# Altium PCB arduino_nano_v2.PcbDoc
Units mm, origin at the board's own origin, x right, y up, seen from the top; angles counter-clockwise.
Board outline 23.24 x 45.72 mm, 4 copper layers (Top Layer, GND, Layer 2, Bottom Layer), stack 0.603 mm thick; 33 components, 43 nets, 167 pads, 63 vias.
Unrouted connection lines stored in the file: 1.
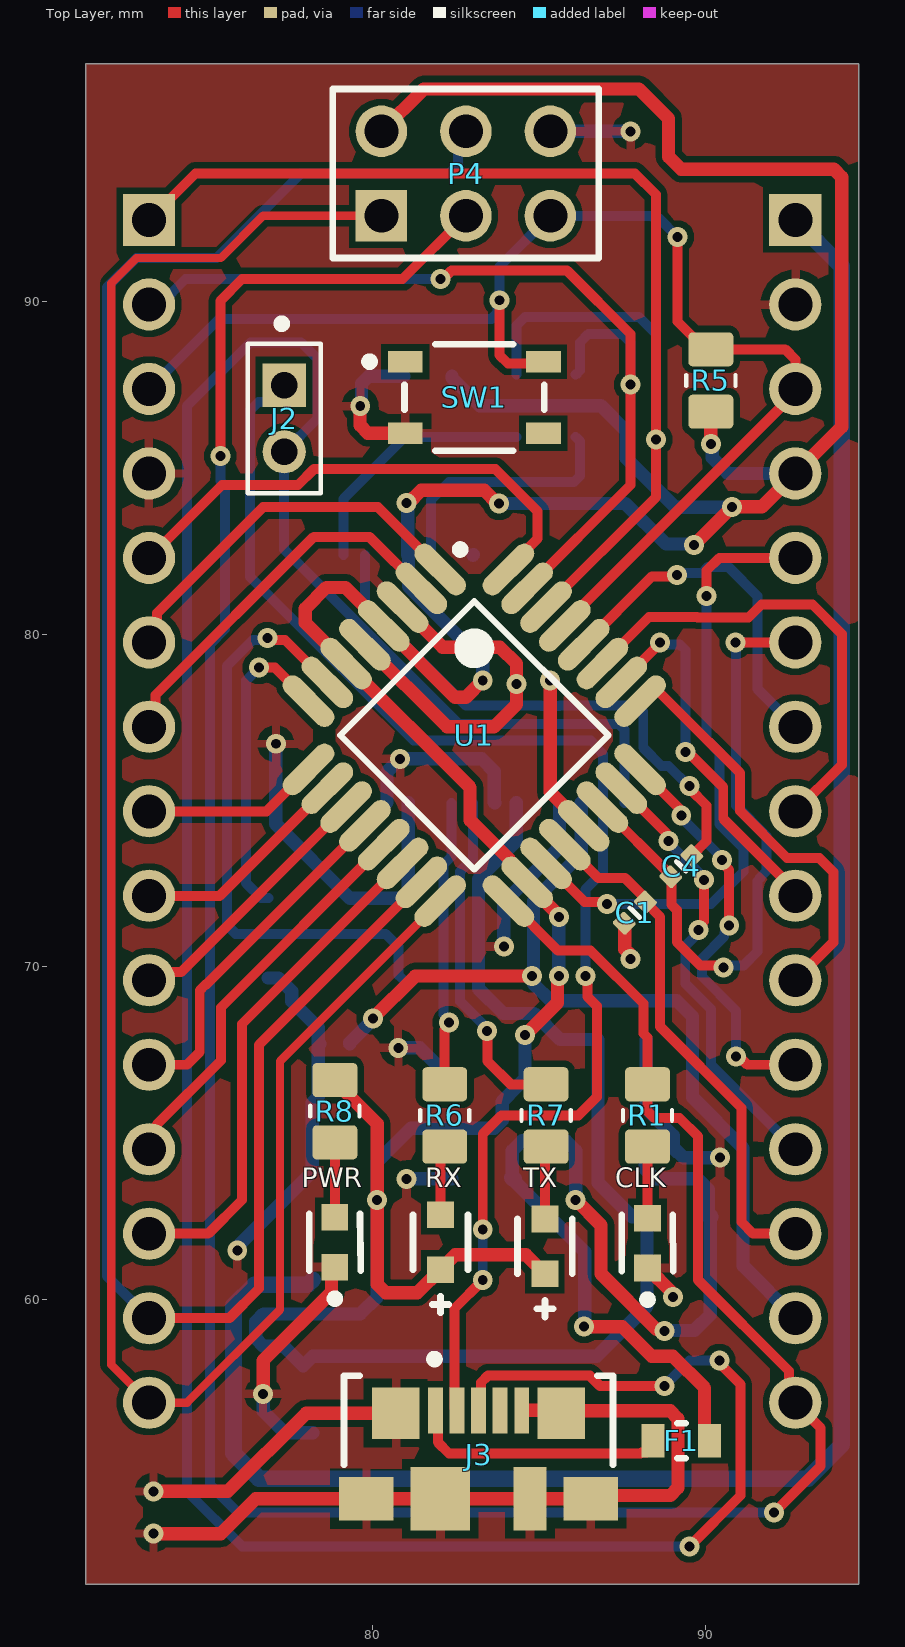
[diagram p0: Top Layer view]
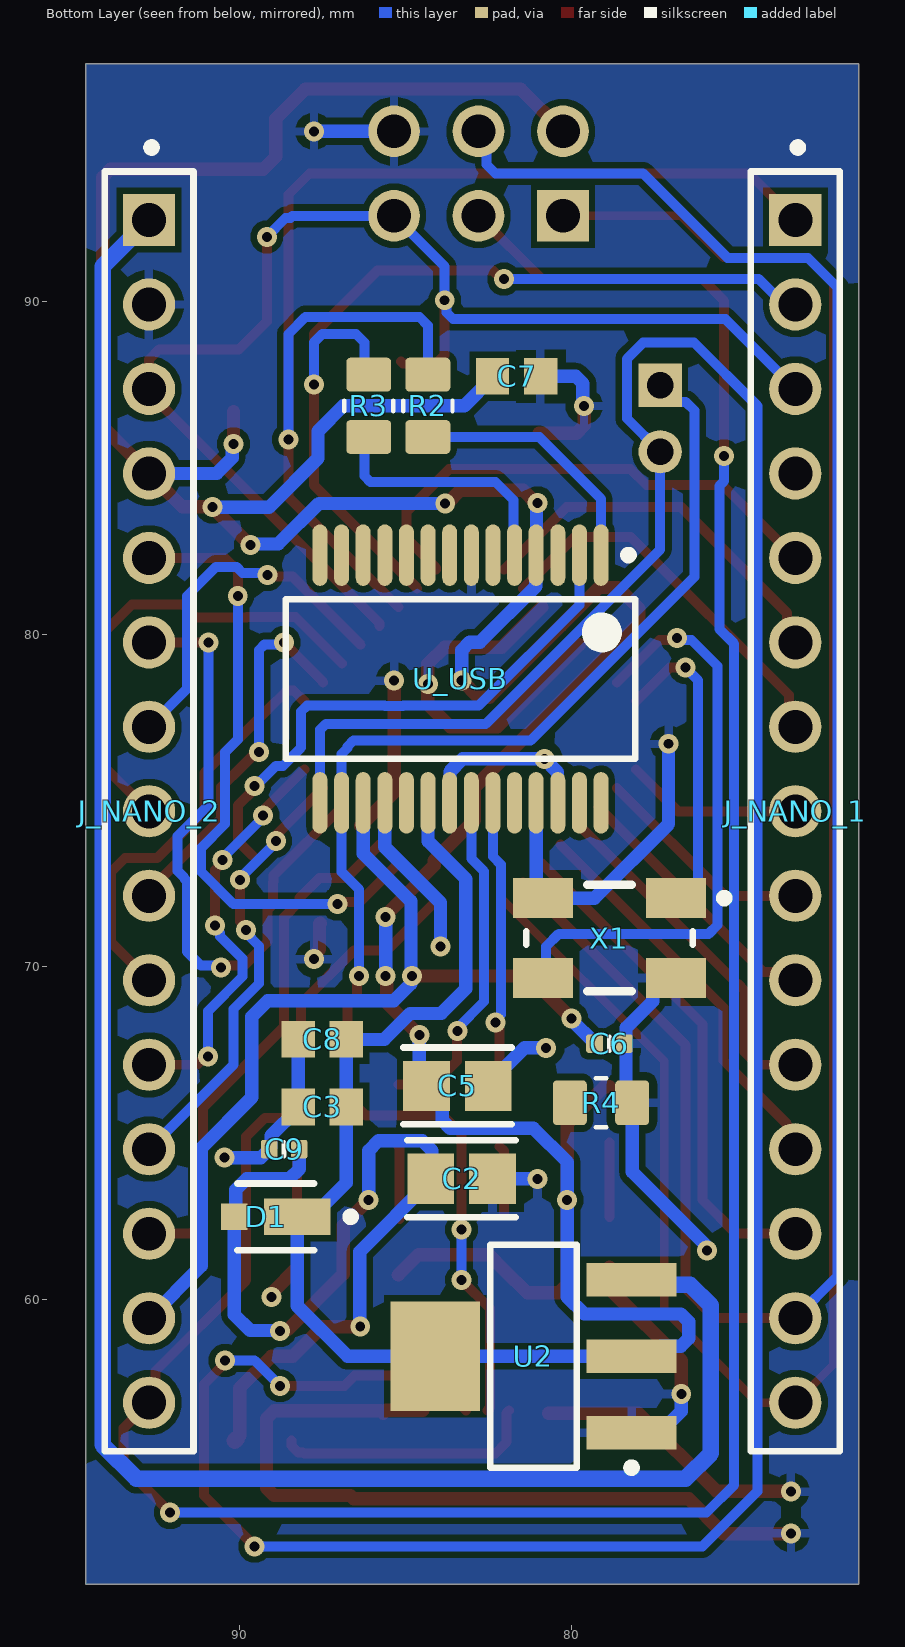
[diagram p1: Bottom Layer view, seen from below]
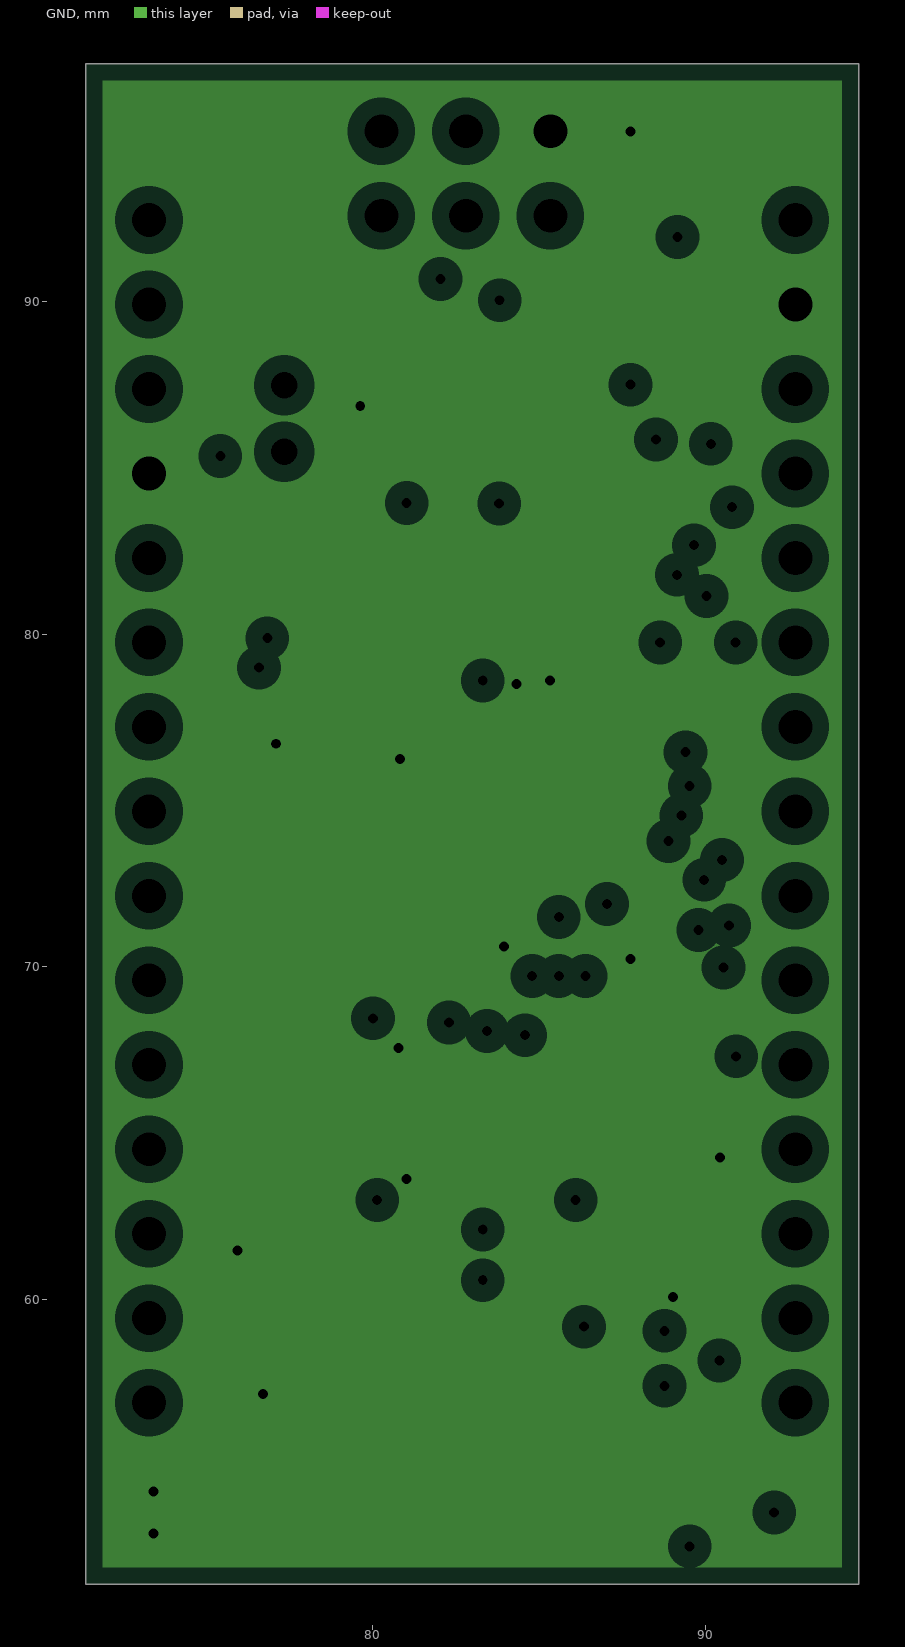
[diagram p2: GND, clearances drawn from the general rule]
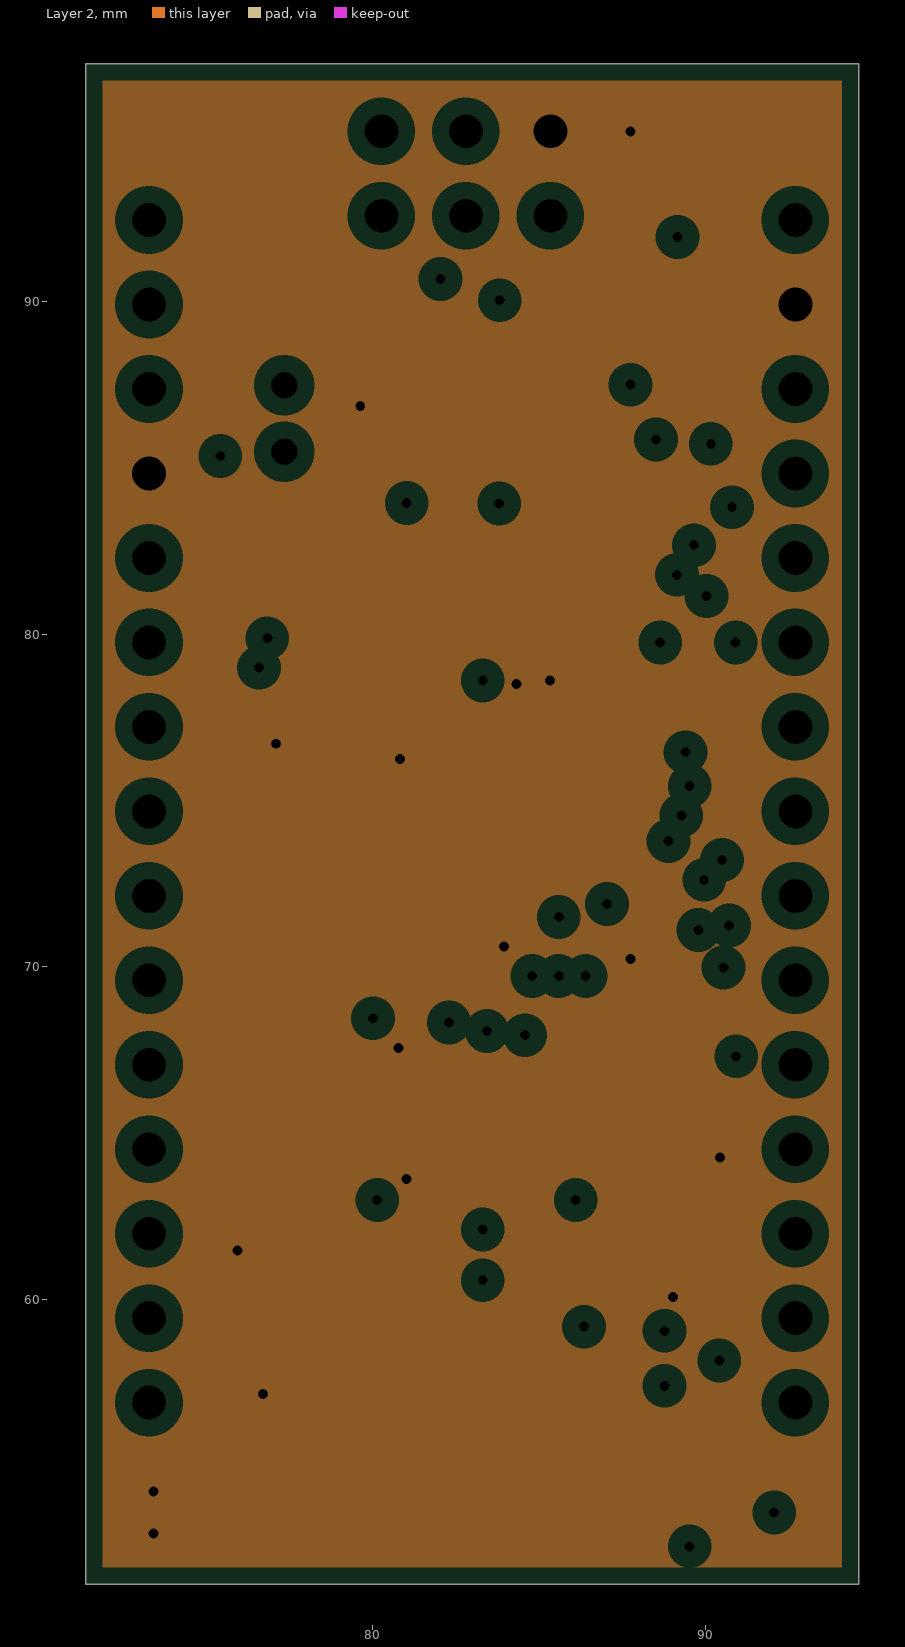
[diagram p3: Layer 2, clearances drawn from the general rule]
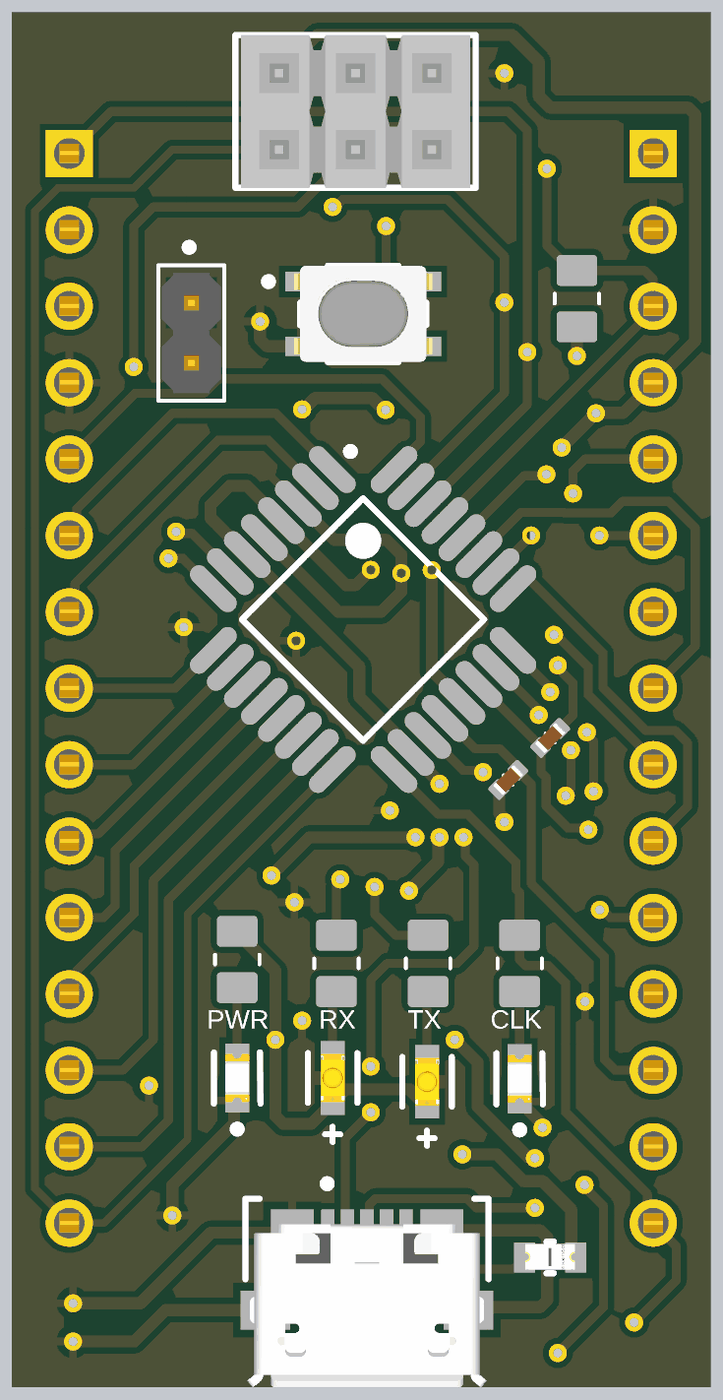
[diagram p4: 3D render of the assembled board from above, using the file's embedded part models]
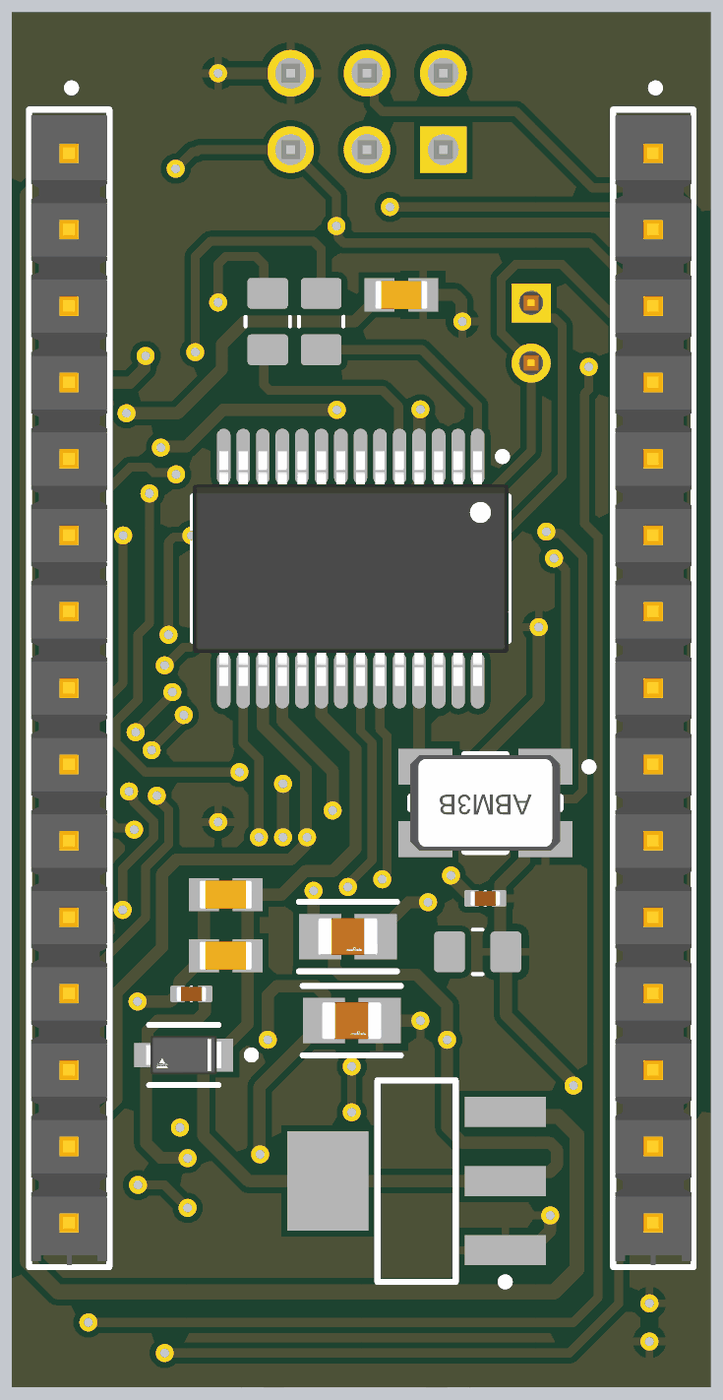
[diagram p5: 3D render of the assembled board from below, using the file's embedded part models]

## Layer stack, top to bottom
Top Solder: solder mask 0.0102, Solder Resist, Dk 3.5
Top Layer: signal copper 0.0356
Dielectric 2: prepreg 0.0711, PP-006, Dk 4.1
GND: plane copper 0.035, net GND
Dielectric 1: dielectric 0.32, FR-4, Dk 4.8
Layer 2: plane copper 0.035, net GND
Dielectric 3: prepreg 0.0711, PP-006, Dk 4.1
Bottom Layer: signal copper 0.0356
Bottom Solder: solder mask 0.0102, Solder Resist, Dk 3.5

## Board outline
71.374,51.435 71.374,97.155 94.615,97.155 94.615,51.435

## Design rules (kind name [scope] priority, off if disabled: settings)
AssemblyTestPointUsage [All] p1: isadvanced=TRUE
AssemblyTestpoint [All] p1: isadvanced=TRUE testpointundercomponent=TRUE minsize=1.016 maxsize=2.54 preferedsize=1.524 minholesize=0 maxholesize=1.016 preferedholesize=0.813 testpointgrid=0.025 usegrid=TRUE gridtolerance=0 allowsidetop=TRUE allowsidebottom=TRUE
Clearance Clearance_1 [OnMid vs OnMid] p1: gap=0.2 ignorepadtopadclearanceinfootprint=FALSE sourcerule=87 cellrowname=All cellrowtype=0 cellcolname=All cellcoltype=0 innerlayers=TRUE
Clearance Clearance_2 [(ExistsOnLayer('Top Layer') Or ExistsOnLayer('Bottom Layer')) vs (ExistsOnLayer('Top Layer') Or ExistsOnLayer('Bottom Layer'))] p2: gap=0.2 ignorepadtopadclearanceinfootprint=FALSE sourcerule=87 cellrowname=All cellrowtype=0 cellcolname=All cellcoltype=0 outerlayers=TRUE
Clearance [All] p3: gap=0.254 ignorepadtopadclearanceinfootprint=FALSE ismatrix=TRUE
ComponentClearance [All] p1: isadvanced=TRUE gap=0.254 collisioncheckmode=3 verticalgap=0.254 showdistances=FALSE
FabricationTestPointUsage [All] p1: isadvanced=TRUE valid=0 allowmultiple=FALSE
FabricationTestpoint [All] p1: isadvanced=TRUE side=3 testpointundercomponent=TRUE minsize=1.016 maxsize=2.54 preferedsize=1.524 minholesize=0 maxholesize=1.016 preferedholesize=0.813 testpointgrid=0.025 allowsidetop=TRUE allowsidebottom=TRUE usegrid=TRUE gridtolerance=0
FanoutControl Fanout_BGA [IsBGA] p1: isadvanced=TRUE bgadir=Out bgaviamode=Centered fanoutstyle=Auto fanoutdirection=Alternating viagrid=0.025 // Fanout_BGA (Default Rule)
FanoutControl Fanout_LCC [IsLCC] p2: isadvanced=TRUE bgadir=Out bgaviamode=Centered fanoutstyle=Auto fanoutdirection=Alternating viagrid=0.025 // Fanout_LCC (Default Rule)
FanoutControl Fanout_SOIC [IsSOIC] p3: isadvanced=TRUE bgadir=Out bgaviamode=Centered fanoutstyle=Auto fanoutdirection=Alternating viagrid=0.025 // Fanout_SOIC (Default Rule)
FanoutControl Fanout_Small [(CompPinCount < 5)] p4: isadvanced=TRUE bgadir=Out bgaviamode=Centered fanoutstyle=Auto fanoutdirection=OutThenIn viagrid=0.025 // Fanout_Small (Default Rule)
FanoutControl Fanout_Default [All] p5: isadvanced=TRUE bgadir=Out bgaviamode=Centered fanoutstyle=Auto fanoutdirection=Alternating viagrid=0.025 // Fanout_Default (Default Rule)
Height [All] p1: isadvanced=TRUE minheight=0 maxheight=25.4 prefheight=12.7
HoleSize [All] p1: isadvanced=TRUE absolutevalues=TRUE maxlimit=2.54 minlimit=0.025 maxpercent=80.000 minpercent=20.000
HoleToHoleClearance [All] p1: isadvanced=TRUE gap=0.254 allowstackedmicrovias=TRUE
LayerPairs [All] p1: isadvanced=TRUE enforce=TRUE
MinimumSolderMaskSliver [All] p1: isadvanced=TRUE minsoldermaskwidth=0.076
NetAntennae [All] p1: isadvanced=TRUE netantennaetolerance=0
PasteMaskExpansion [All] p1: isadvanced=TRUE expansion=0
PlaneClearance [All] p1: isadvanced=TRUE clearance=0.508
PlaneConnect [All] p1: isadvanced=TRUE planeconnectstyle=Relief reliefexpansion=0.508 reliefentries=4 reliefconductorwidth=0.254 reliefairgap=0.254
PolygonConnect [All] p1: connectstyle=Relief reliefconductorwidth=0.254 reliefentries=4 polygonreliefangle="90 Angle" airgapwidth=0.254
RoutingCorners [All] p1: isadvanced=TRUE cornerstyle=45-Degree minsetback=2.54 maxsetback=2.54
RoutingPriority [All] p1: isadvanced=TRUE routingpriority=0
RoutingVias [All] p1: holewidth=0.3 width=0.6 viastyle="Through Hole" minholewidth=0.2 minwidth=0.4 maxholewidth=0.5 maxwidth=1.27
ShortCircuit [All] p1: isadvanced=TRUE allowed=FALSE
SilkToSilkClearance [All] p1: isadvanced=TRUE silktosilkclearance=0.254
SilkToSolderMaskClearance [IsPad] p1: isadvanced=TRUE minsilkscreentomaskgap=0.076 clearancetoexposedcopper=TRUE
SolderMaskExpansion [All] p1: isadvanced=TRUE expansion=0 istentingtop=FALSE
SupplyNets "Schematic Supply Nets_4" [InNet('VIN')] p1: isadvanced=TRUE voltage=0.000
SupplyNets "Schematic Supply Nets_3" [InNet('VUSB')] p2: isadvanced=TRUE voltage=0.000
SupplyNets "Schematic Supply Nets_2" [InNet('3V3')] p3: isadvanced=TRUE voltage=0.000
SupplyNets "Schematic Supply Nets_1" [InNet('+5V')] p4: isadvanced=TRUE voltage=0.000
SupplyNets "Schematic Supply Nets" [InNet('GND')] p5: isadvanced=TRUE voltage=0.000
UnRoutedNet [All] p1: isadvanced=TRUE
UnpouredPolygon [All] p1: isadvanced=TRUE
Width MaxMinWidth_3 [InNet('GND')] p1: maxlimit=0.6 minlimit=0.3 preferedwidth=0.4 minimp=50.000000 maximp=50.000000 favimp=50.000000
Width MaxMinWidth_1 [InNet('+5V')] p2: maxlimit=0.6 minlimit=0.3 preferedwidth=0.4 minimp=50.000000 maximp=50.000000 favimp=50.000000
Width MaxMinWidth_11 [InNetClass('PWR')] p3: isadvanced=TRUE maxlimit=0.8 minlimit=0.3 preferedwidth=0.5 minimp=50.000000 maximp=50.000000 favimp=50.000000
Width MaxMinWidth_2 [InNet('3V3')] p4: maxlimit=0.6 minlimit=0.3 preferedwidth=0.4 minimp=50.000000 maximp=50.000000 favimp=50.000000
Width MaxMinWidth_6 [InNet('D-')] p5: maxlimit=0.3 minlimit=0.2 preferedwidth=0.254 minimp=50.000000 maximp=50.000000 favimp=50.000000
Width MaxMinWidth_7 [InNet('VIN')] p6: maxlimit=0.6 minlimit=0.3 preferedwidth=0.4 minimp=50.000000 maximp=50.000000 favimp=50.000000
Width MaxMinWidth_8 [InNet('VUSB')] p7: maxlimit=0.6 minlimit=0.3 preferedwidth=0.4 minimp=50.000000 maximp=50.000000 favimp=50.000000
Width MaxMinWidth_9 [InNet('D+')] p8: maxlimit=0.3 minlimit=0.2 preferedwidth=0.254 minimp=50.000000 maximp=50.000000 favimp=50.000000
Width MaxMinWidth_10 [InNet('MISO')] p9: maxlimit=0.3 minlimit=0.2 preferedwidth=0.254 minimp=50.000000 maximp=50.000000 favimp=50.000000
Width MaxMinWidth_12 [InNet('MOSI')] p10: maxlimit=0.3 minlimit=0.2 preferedwidth=0.254 minimp=50.000000 maximp=50.000000 favimp=50.000000
Width MaxMinWidth_13 [InNet('NetC1_2')] p11: maxlimit=0.3 minlimit=0.2 preferedwidth=0.254 minimp=50.000000 maximp=50.000000 favimp=50.000000
Width MaxMinWidth_14 [InNet('NetC4_1')] p12: maxlimit=0.3 minlimit=0.2 preferedwidth=0.254 minimp=50.000000 maximp=50.000000 favimp=50.000000
Width MaxMinWidth_15 [InNet('NetC4_2')] p13: maxlimit=0.3 minlimit=0.2 preferedwidth=0.254 minimp=50.000000 maximp=50.000000 favimp=50.000000
Width MaxMinWidth_16 [InNet('NetCLK_2')] p14: maxlimit=0.3 minlimit=0.2 preferedwidth=0.254 minimp=50.000000 maximp=50.000000 favimp=50.000000
Width MaxMinWidth_17 [InNet('NetF1_1')] p15: maxlimit=0.3 minlimit=0.2 preferedwidth=0.254 minimp=50.000000 maximp=50.000000 favimp=50.000000
Width MaxMinWidth_18 [InNet('NetJ_NANO_1_5')] p16: maxlimit=0.3 minlimit=0.2 preferedwidth=0.254 minimp=50.000000 maximp=50.000000 favimp=50.000000
Width MaxMinWidth_19 [InNet('NetJ_NANO_1_6')] p17: maxlimit=0.3 minlimit=0.2 preferedwidth=0.254 minimp=50.000000 maximp=50.000000 favimp=50.000000
Width MaxMinWidth_20 [InNet('NetJ_NANO_1_7')] p18: maxlimit=0.3 minlimit=0.2 preferedwidth=0.254 minimp=50.000000 maximp=50.000000 favimp=50.000000
Width MaxMinWidth_21 [InNet('NetJ_NANO_1_8')] p19: maxlimit=0.3 minlimit=0.2 preferedwidth=0.254 minimp=50.000000 maximp=50.000000 favimp=50.000000
Width MaxMinWidth_22 [InNet('NetJ_NANO_1_9')] p20: maxlimit=0.3 minlimit=0.2 preferedwidth=0.254 minimp=50.000000 maximp=50.000000 favimp=50.000000
Width MaxMinWidth_23 [InNet('NetJ_NANO_1_10')] p21: maxlimit=0.3 minlimit=0.2 preferedwidth=0.254 minimp=50.000000 maximp=50.000000 favimp=50.000000
Width MaxMinWidth_24 [InNet('NetJ_NANO_1_11')] p22: maxlimit=0.3 minlimit=0.2 preferedwidth=0.254 minimp=50.000000 maximp=50.000000 favimp=50.000000
Width MaxMinWidth_25 [InNet('NetJ_NANO_1_12')] p23: maxlimit=0.3 minlimit=0.2 preferedwidth=0.254 minimp=50.000000 maximp=50.000000 favimp=50.000000
Width MaxMinWidth_26 [InNet('NetJ_NANO_1_13')] p24: maxlimit=0.3 minlimit=0.2 preferedwidth=0.254 minimp=50.000000 maximp=50.000000 favimp=50.000000
Width MaxMinWidth_27 [InNet('NetJ_NANO_2_5')] p25: maxlimit=0.3 minlimit=0.2 preferedwidth=0.254 minimp=50.000000 maximp=50.000000 favimp=50.000000
Width MaxMinWidth_28 [InNet('NetJ_NANO_2_7')] p26: maxlimit=0.3 minlimit=0.2 preferedwidth=0.254 minimp=50.000000 maximp=50.000000 favimp=50.000000
Width MaxMinWidth_29 [InNet('NetJ_NANO_2_8')] p27: maxlimit=0.3 minlimit=0.2 preferedwidth=0.254 minimp=50.000000 maximp=50.000000 favimp=50.000000
Width MaxMinWidth_30 [InNet('NetJ_NANO_2_9')] p28: maxlimit=0.3 minlimit=0.2 preferedwidth=0.254 minimp=50.000000 maximp=50.000000 favimp=50.000000
Width MaxMinWidth_31 [InNet('NetJ_NANO_2_10')] p29: maxlimit=0.3 minlimit=0.2 preferedwidth=0.254 minimp=50.000000 maximp=50.000000 favimp=50.000000
Width MaxMinWidth_32 [InNet('NetJ_NANO_2_11')] p30: maxlimit=0.3 minlimit=0.2 preferedwidth=0.254 minimp=50.000000 maximp=50.000000 favimp=50.000000
Width MaxMinWidth_33 [InNet('NetJ_NANO_2_12')] p31: maxlimit=0.3 minlimit=0.2 preferedwidth=0.254 minimp=50.000000 maximp=50.000000 favimp=50.000000
Width MaxMinWidth_34 [InNet('NetPWR_2')] p32: maxlimit=0.3 minlimit=0.2 preferedwidth=0.254 minimp=50.000000 maximp=50.000000 favimp=50.000000
Width MaxMinWidth_35 [InNet('NetR2_2')] p33: maxlimit=0.3 minlimit=0.2 preferedwidth=0.254 minimp=50.000000 maximp=50.000000 favimp=50.000000
Width MaxMinWidth_36 [InNet('NetR3_2')] p34: maxlimit=0.3 minlimit=0.2 preferedwidth=0.254 minimp=50.000000 maximp=50.000000 favimp=50.000000
Width MaxMinWidth_37 [InNet('NetR6_1')] p35: maxlimit=0.3 minlimit=0.2 preferedwidth=0.254 minimp=50.000000 maximp=50.000000 favimp=50.000000
Width MaxMinWidth_38 [InNet('NetR6_2')] p36: maxlimit=0.3 minlimit=0.2 preferedwidth=0.254 minimp=50.000000 maximp=50.000000 favimp=50.000000
Width MaxMinWidth_39 [InNet('NetR7_1')] p37: maxlimit=0.3 minlimit=0.2 preferedwidth=0.254 minimp=50.000000 maximp=50.000000 favimp=50.000000
Width MaxMinWidth_40 [InNet('NetR7_2')] p38: maxlimit=0.3 minlimit=0.2 preferedwidth=0.254 minimp=50.000000 maximp=50.000000 favimp=50.000000
Width MaxMinWidth_41 [InNet('PB5_SCK')] p39: maxlimit=0.3 minlimit=0.2 preferedwidth=0.254 minimp=50.000000 maximp=50.000000 favimp=50.000000
Width MaxMinWidth_42 [InNet('PB6')] p40: maxlimit=0.3 minlimit=0.2 preferedwidth=0.254 minimp=50.000000 maximp=50.000000 favimp=50.000000
Width MaxMinWidth_43 [InNet('PB7')] p41: maxlimit=0.3 minlimit=0.2 preferedwidth=0.254 minimp=50.000000 maximp=50.000000 favimp=50.000000
Width MaxMinWidth_44 [InNet('PD0_RXD')] p42: maxlimit=0.3 minlimit=0.2 preferedwidth=0.254 minimp=50.000000 maximp=50.000000 favimp=50.000000
Width MaxMinWidth_45 [InNet('PD1_TXD')] p43: maxlimit=0.3 minlimit=0.2 preferedwidth=0.254 minimp=50.000000 maximp=50.000000 favimp=50.000000
Width MaxMinWidth_46 [InNet('RESET')] p44: maxlimit=0.3 minlimit=0.2 preferedwidth=0.254 minimp=50.000000 maximp=50.000000 favimp=50.000000
Width MaxMinWidth_4 [InNetClass('PWR')] p45: maxlimit=0.6 minlimit=0.3 preferedwidth=0.4 minimp=50.000000 maximp=50.000000 favimp=50.000000
Width MaxMinWidth_5 [InNetClass('SIGNAL')] p46: maxlimit=0.3 minlimit=0.2 preferedwidth=0.254 minimp=50.000000 maximp=50.000000 favimp=50.000000
Width [All] p47: maxlimit=0.254 minlimit=0.254 preferedwidth=0.254
4 further rules are at their usual default settings.

## Classes and differential pairs
component class U_USB: C4 C6 F1 J2 J3 R6 R7 RX TX U_USB
component class U_connector: J_NANO_1 J_NANO_2
component class U_arduino_nano: C1 C2 C3 C5 C7 C8 C9 CLK D1 P4 PWR R1 R2 R3 R4 R5 R8 SW1 X1

## Components (designator, comment, footprint, x,y, rotation, side; value= is the part's Value field where it differs from the comment)
C1 "Capacitor 100nF +/-20% 25V 0402" CAPC0402(1005)60_L 87.884,71.628 r45 top value=100nF
C2 "4.7 uF" FP-GRM21B-0_15-IPC_A 83.312,63.627 r180 bottom
C3 "Capacitor 1uF +/- 10% 16V 0603" CAPC1608X90X35ML15T15 87.503,65.786 r0 bottom value=1µF
C4 "Capacitor 100nF +/-20% 25V 0402" CAPC0402(1005)60_L 89.281,73.025 r225 top value=100nF
C5 "4.7 uF" FP-GRM21B-0_15-IPC_A 83.439,66.421 r180 bottom
C6 "Capacitor 100nF +/-20% 25V 0402" CAPC0402(1005)60_L 78.867,67.691 r180 bottom value=100nF
C7 "Capacitor 1uF +/- 10% 16V 0603" CAPC1608X90X35ML15T15 81.661,87.757 r180 bottom value=1µF
C8 "Capacitor 1uF +/- 10% 16V 0603" CAPC1608X90X35ML15T15 87.503,67.818 r180 bottom value=1µF
C9 "Capacitor 100nF +/-20% 25V 0402" CAPC0402(1005)60_L 88.646,64.516 r0 bottom value=100nF
CLK "" FP-5973901831F-MFG 88.265,61.695 r90 top
D1 "MSS1P3L-M3/89A" FP-96591-MFG 88.9,62.484 r0 bottom value=65pF
F1 "MF-FSMF050X-2" FP-MF-FSMF-MFG 89.281,55.753 r0 top value=0.1-0.8Ω
J2 "NRPN021PAEN-RC" NRPN021PAEN-RC_MFG 77.343,86.487 r270 top
J3 "473460001" FP-473460001-MFG 83.185,54.356 r0 top
J_NANO_1 "TSW-115-07-G-S" FP-TSW-115-07-G-S-MFG 73.279,74.676 r90 bottom
J_NANO_2 "TSW-115-07-G-S" FP-TSW-115-07-G-S-MFG 92.71,74.676 r90 bottom
P4 "TSW-103-08-T-D" SMTC-TSW-103-08-X-D 80.264,92.583 r0 top
PWR "" FP-5973901831F-MFG 78.867,61.722 r90 top
R1 "ERJP06J102V_with_model" RESC2012X70N 88.265,65.532 r270 top value=1k
R2 "ERJP06J102V_with_model" RESC2012X70N 84.328,86.868 r270 bottom value=1k
R3 "ERJP06J102V_with_model" RESC2012X70N 86.106,86.868 r270 bottom value=1k
R4 "ERJP06J102V_with_model" RESC2012X70N 79.121,65.913 r0 bottom value=1k
R5 "ERJP06J102V_with_model" RESC2012X70N 90.17,87.63 r270 top value=1k
R6 "ERJP06J102V_with_model" RESC2012X70N 82.169,65.532 r90 top value=1k
R7 "ERJP06J102V_with_model" RESC2012X70N 85.217,65.532 r90 top value=1k
R8 "ERJP06J102V_with_model" RESC2012X70N 78.867,65.659 r270 top value=1k
RX "" FP-APTD1608SYC-J3-MFG 82.042,61.722 r270 top
SW1 "" FP-PTS810SJM250SMTRLFS-MFG 83.058,87.122 r0 top
TX "" FP-APTD1608SYC-J3-MFG 85.182,61.595 r270 top
U1 "ATmega328P-AU" 32A_M 83.058,76.962 r315 top
U2 "LM1117IMPX-5.0/NOPB" MP04A_M 81.153,58.293 r0 bottom
U_USB "FT232RL" FTDI-SSOP-28_M 83.346,78.655 r270 bottom
X1 "ABM3B-16.000MHZ-B2-T" ABRA-ABM3B-4_V 78.867,70.866 r0 bottom

## Footprints (in the part's own frame and the unit in brackets; to place one, negate y for a bottom-side part, rotate by r counter-clockwise, add the part's x,y. Pads: shape width x height; smd on the part's side, far side on the other; paste and mask are expansions set on the pad)
32A_M [mm] "Thin QFP, 32-Leads, Body 7x7mm, Pitch 0.8mm, IPC Low Density"
  oval 1.95x0.6 smd: 1(-4.25,2.8) 2(-4.25,2) 3(-4.25,1.2) 4(-4.25,0.4) 5(-4.25,-0.4) 6(-4.25,-1.2) 7(-4.25,-2) 8(-4.25,-2.8) 17(4.25,-2.8) 18(4.25,-2) 19(4.25,-1.2) 20(4.25,-0.4) 21(4.25,0.4) 22(4.25,1.2) 23(4.25,2) 24(4.25,2.8)
  oval 0.6x1.95 smd: 9(-2.8,-4.25) 10(-2,-4.25) 11(-1.2,-4.25) 12(-0.4,-4.25) 13(0.4,-4.25) 14(1.2,-4.25) 15(2,-4.25) 16(2.8,-4.25) 25(2.8,4.25) 26(2,4.25) 27(1.2,4.25) 28(0.4,4.25) 29(-0.4,4.25) 30(-1.2,4.25) 31(-2,4.25) 32(-2.8,4.25)
  silkscreen extent -4.37,-2.85 2.85,3.77, body extent -3.5,-3.5 3.5,3.5, height 1.2
ABRA-ABM3B-4_V [mm] "SMD, 4-Leads, Body 5x3.2mm"
  rect 1.8x1.2 smd: 1(-2,-1.2) 2(2,-1.2) 3(2,1.2) 4(-2,1.2)
  silkscreen extent -3.57,-1.6 2.5,1.6, body extent -2.5,-1.59 2.5,1.59, height 1.13
CAPC0402(1005)60_L [mm] "Chip Capacitor, Body 1.0x0.5mm, Height 0.6mm, IPC High Density"
  rrect25% 0.5x0.55 smd: 1(-0.45,0) 2(0.45,0)
  silkscreen extent 0,-0.2 0,0.2, body extent -0.5,-0.25 0.5,0.25, height 0.6
CAPC1608X90X35ML15T15 [mm] "Chip Capacitor, 2-Leads, Body 1.75x0.95mm, IPC Low Density"
  rect 1x1.1 smd: 1(-0.725,0) 2(0.725,0)
  body extent -0.87,-0.48 0.87,0.48, height 0.9
FP-96591-MFG [mm]
  rect 2x1.1 smd paste+0 mask+0: 1(-0.65,0)
  rect 0.8x0.8 smd paste+0 mask+0: 2(1.25,0)
  silkscreen extent -2.37,-1 1.15,1, body extent -1.25,-0.65 1.25,0.65, height 0.73
FP-473460001-MFG [mm]
  rect 0.45x1.38 smd paste+0 mask+0: 1(-1.3,2.31) 2(-0.65,2.31) 3(0,2.31) 4(0.65,2.31) 5(1.3,2.31)
  rect 1.425x1.55 smd paste+0 mask+0: 6(-2.488,2.225) 7(2.488,2.225)
  rect 1.65x1.3 smd paste+0 mask+0: 8(-3.375,-0.35) 11(3.375,-0.35)
  rect 1.8x1.9 smd paste+0 mask+0: 9(-1.15,-0.35)
  rect 1x1.9 smd paste+0 mask+0: 10(1.55,-0.35)
  silkscreen extent -4.05,0.67 4.05,3.97, body extent -4.3,-2.48 4.3,3.45, height 0.25
FP-5973901831F-MFG [mm]
  rect 0.8x0.8 smd paste+0 mask+0: 1(-0.75,0) 2(0.75,0)
  silkscreen extent -1.82,-0.77 0.85,0.77, body extent -1.25,-0.56 1.25,0.56, height 0.25
FP-APTD1608SYC-J3-MFG [mm]
  rect 0.8x0.8 smd paste+0 mask+0: 1(-0.825,0) 2(0.825,0)
  silkscreen extent -0.82,-0.82 2.12,0.82, body extent -1.33,-0.58 1.33,0.58, height 0.25
FP-GRM21B-0_15-IPC_A [mm]
  rect 1.406x1.508 smd paste+0 mask+0: 1(-0.926,0) 2(0.926,0)
  silkscreen extent -1.63,-1.15 1.63,1.15, body extent -1,-0.63 1,0.63, height 1.4
FP-MF-FSMF-MFG [mm]
  rect 0.7x1 smd paste+0 mask+0: 1(-0.85,0) 2(0.85,0)
  silkscreen extent -0.13,-0.53 0.13,0.53, body extent -1.3,-0.63 1.3,0.63, height 0.25
FP-PTS810SJM250SMTRLFS-MFG [mm]
  rect 1.05x0.65 smd paste+0 mask+0: 1(-2.075,1.075) 2(2.075,1.075) 3(-2.075,-1.075) 4(2.075,-1.075)
  silkscreen extent -3.27,-1.6 2.1,1.6, body extent -2.7,-1.7 2.7,1.7, height 0.25
FP-TSW-115-07-G-S-MFG [mm]
  rect 1.57x1.57 hole 1.02 paste-2539.97 mask+0: 1(17.78,0)
  round 1.57 hole 1.02 paste-2539.97 mask+0: 2(15.24,0) 3(12.7,0) 4(10.16,0) 5(7.62,0) 6(5.08,0) 7(2.54,0) 8(0,0) 9(-2.54,0) 10(-5.08,0) 11(-7.62,0) 12(-10.16,0) 13(-12.7,0) 14(-15.24,0) 15(-17.78,0)
  silkscreen extent -19.24,-1.34 20.08,1.34, body extent -19.18,-1.27 19.05,1.27, height 8.63
FTDI-SSOP-28_M [mm] "SOP, 28-Leads, Body 10.5x5.6mm, Pitch 0.65mm, IPC Low Density"
  oval 1.85x0.45 smd: 1(-3.725,4.225) 2(-3.725,3.575) 3(-3.725,2.925) 4(-3.725,2.275) 5(-3.725,1.625) 6(-3.725,0.975) 7(-3.725,0.325) 8(-3.725,-0.325) 9(-3.725,-0.975) 10(-3.725,-1.625) 11(-3.725,-2.275) 12(-3.725,-2.925) 13(-3.725,-3.575) 14(-3.725,-4.225) 15(3.725,-4.225) 16(3.725,-3.575) 17(3.725,-2.925) 18(3.725,-2.275) 19(3.725,-1.625) 20(3.725,-0.975) 21(3.725,-0.325) 22(3.725,0.325) 23(3.725,0.975) 24(3.725,1.625) 25(3.725,2.275) 26(3.725,2.925) 27(3.725,3.575) 28(3.725,4.225)
  silkscreen extent -3.85,-5.25 2.4,5.25, body extent -3.9,-5.25 3.9,5.25, height 2
MP04A_M [mm] "SOT223, 4-Leads, Body 6.5x3.5mm, Pitch 2.3mm, Lead Span 7mm, IPC Low Density"
  rect 2.7x1 smd: 1(-2.95,2.3) 2(-2.95,0) 3(-2.95,-2.3)
  rect 2.7x3.3 smd: 4(2.95,0)
  silkscreen extent -3.07,-3.35 1.3,3.47, body extent -1.86,-3.35 1.86,3.35, height 1.8
NRPN021PAEN-RC_MFG [mm] "Recommended Land Pattern"
  rect 1.3x1.3 hole 0.8 paste-2539.97 mask+0: 1(-1,0)
  round 1.3 hole 0.8 paste-2539.97 mask+0: 2(1,0)
  silkscreen extent -2.97,-1.1 2.25,1.1, body extent -2,-1 2,1, height 5.95
RESC2012X70N [mm] "Chip Resistor, 2-Leads, Body 2,00x1,25mm, IPC Medium Density"
  rrect25% 1.025x1.35 smd: 1(-0.937,0) 2(0.938,0)
  silkscreen extent -0.16,-0.74 0.16,0.74, body extent -1,-0.63 1,0.63, height 0.7
SMTC-TSW-103-08-X-D [mm] ".025 SQ Post Terminal Strip Assembly, 2x3 Pins, Vertical, 2.54mm Pitch, Male"
  rect 1.55x1.55 hole 1.02: 1(0,0)
  round 1.55 hole 1.02: 2(0,2.54) 3(2.54,0) 4(2.54,2.54) 5(5.08,0) 6(5.08,2.54)
  silkscreen extent -1.46,-1.27 6.54,3.81, body extent -1.27,-1.27 6.35,3.81, height 8.38

## Part data
C1 C4 C6 C9: library part CMP-001-00065-4, "Chip Capacitor, 100nF +/-20%, 25V, 0402, Thickness 0.6 mm", Case/Package=0402, Max Operating Temperature=85°C, Min Operating Temperature=-55°C, Tolerance=10%, Voltage Rating=25V, Mounting Technology=SMT, Pins=2
C2 C5: library part CMP-06035-033280-1, "Chip Multilayer Ceramic Capacitors for General Purpose, 0805, 4.7uF, X6S, 22%, 20%, 35V", Capacitance=4.7uF, Case/Package=0805, Dielectric=X6S, Tolerance=20%, Voltage Rating (DC)=35V, Length=2mm, Thickness=1.25mm, Width=1.25mm
C3 C7 C8: library part CMP-001-00004-6, "Chip Capacitor, 1 uF, +/- 10%, 16 V, 0603 (1608 Metric)", Capacitor Type=Ceramic, Case/Package=0603, Max Operating Temperature=125°C, Min Operating Temperature=-55°C, Tolerance=10%, Voltage Rating=16V, Mounting Technology=SM, Pins=2, RoHS Compliant=True
CLK PWR: library part CMP-15384-000002-3, "LED COOL WHITE 2SMD", Case Code (Imperial)=0603, Case Code (Metric)=1608, Color=White, Forward Current=10mA, Forward Voltage=3.4V, Lens Color=Yellow, Max Operating Temperature=80°C, Min Operating Temperature=-20°C, Power Dissipation=70mW, Reverse Voltage=5V, Case/Package=0603, Height=550µm, Illumination Color=White, Length=1.6mm, Lens Style="Diffused, Rectangular, Tinted", Luminous Intensity=240mcd, Mount="Surface Mount", NexarPartId=10598902, Packaging="Cut Tape", Power Rating=70mW, REACH SVHC="No SVHC", RoHS=Compliant, Test Current=10mA, Viewing Angle=130°, Width=800µm
D1: library part CMP-02539-000006-1, "DIODE SCHOTTKY 30V 1A MICROSMP", Capacitance=65pF, Forward Current=1A, Manufacturer=Vishay, Max Junction Temp=+150°C, Max Repetitive Reverse Voltage=30V, Max Surge Forward Current=25A, Package=96591, Peak Reverse Current=15uA, Temperature="-55°C to +150°C", Temperature Range Low=-55°C, Automotive=No, Category=Diode, ComponentLink2Description=Datasheet, ComponentLink2URL=http://www.vishay.com/docs/89020/mss1p3l.pdf, Device Class L1="Discrete Semiconductors", Device Class L2=Diodes, Device Class L3="Schottky Diodes", Digikey Description="DIODE SCHOTTKY 30V 1A MICROSMP", Footprint Url=http://www.vishay.com/docs/96591/microsmp_do-219ad_fredpt.pdf, Height=0.73mm, Lead Free=Yes, Manufacturer Part Number=MSS1P3L-M3/89A, Mouser Description="Schottky Diodes & Rectifiers 1.0 Amp 30 Volt", Octopart=https://octopart.com/mss1p3l-m3%2F89a-vishay-42670898, RoHS=TRUE, Temperature Range High=+150°C
F1: library part CMP-07400-000010-1, "PTC RESET FUSE 6V 500MA 0603", Ambient Temperature Range High=+85°C, Ambient Temperature Range Low=-40°C, Current Rating=40A, Hold Current=0.5A, Manufacturer="Bourns Inc.", Package=MF-FSMF, Resistance=0.1-0.8Ω, Temperature="-40°C to +85°C", Trip Current=1A, Voltage Rating=6V, Automotive=No, Category=Fuse, ComponentLink2Description=Datasheet, ComponentLink2URL=https://www.bourns.com/docs/Product-Datasheets/mffsmf.pdf, Device Class L1="Circuit Protection", Device Class L2="PTC Resettable Fuses", Device Class L3=unset, Digikey Description="PTC RESET FUSE 6V 500MA 0603", Height=1mm, Lead Free=Yes, Manufacturer Part Number=MF-FSMF050X-2, Mouser Description="Resettable Fuses - PPTC 6volts 40amps", Octopart=https://octopart.com/mf-fsmf050x-2-bourns-10470804, RoHS=TRUE, Temperature Range High=+85°C, Temperature Range Low=-40°C, Trip Time=0.1s
J2: library part CMP-00595-12086179-1, "Male 2 C, Straight, .079\" CC; 3.60mm head/2.80mm tail No Mt.; Nylon 6-T, Brass, 105 C", Color=Black, Contact Resistance=20mΩ, Current Rating=1A, Insulation Resistance=5GΩ, Max Operating Temperature=105°C, Min Operating Temperature=-40°C, Voltage Rating=150V, ComponentLink2Description="Datasheet URL", ComponentLink2URL=https://drawings-pdf.s3.amazonaws.com/10531.pdf, ComponentLink3Description="Manufacturer's Package Drawing", ComponentLink3URL=https://drawings-pdf.s3.amazonaws.com/10531.pdf, Connector Type="Male Pin", Contact Material=Brass, Contact Mating Length=3.5814mm, Contact Plating=Gold, Gender=Male, HelpURL=https://drawings-pdf.s3.amazonaws.com/10531.pdf, Lead Free="Lead Free", Lifecycle Status=Production, Material=Nylon, Mount="Through Hole", Number of Contacts=2, Number of Positions=2, Number of Rows=1, Packaging=Bulk, Pitch=2.0066mm, REACH SVHC=Yes, RoHS=Compliant, Terminal Pitch=2mm, Termination=Solder
J3: library part CMP-2000-05246-2, "CONN RCPT USB2.0 MICRO B SMD R/A", Current Rating=1.8A, Manufacturer=Molex, Package=0, Temperature="-30°C to +85°C", Temperature Range High=+85°C, Temperature Range Low=-30°C, Voltage Rating=30V, Automotive=No, Category=Conn, ComponentLink2Description=Datasheet, ComponentLink2URL=https://www.molex.com/webdocs/datasheets/pdf/en-us/0473460001_IO_CONNECTORS.pdf, Conn Orientation="Right Angle", Contact Material=Gold,Nickel, Device Class L1=Connectors, Device Class L2="USB Connectors", Device Class L3=unset, Digikey Description="CONN RCPT USB2.0 MICRO B SMD R/A", Footprint Url=https://www.molex.com/pdm_docs/sd/473460001_sd.pdf, Height=2.945mm, Is Female=yes, Lead Free=Yes, Manufacturer Part Number=473460001, Number of Contacts=5, Octopart=https://octopart.com/47346-0001-molex-7164928, Pitch=0.65mm, RoHS=TRUE, Shielding=true, Usb Standard="USB 2.0"
J_NANO_1 J_NANO_2: library part CMP-02766-000090-1, "CONN HEADER VERT 15POS 2.54MM", Manufacturer=SAMTEC, Temperature="-55°C to +125°C", Temperature Range High=+125°C, Temperature Range Low=-55°C, Automotive=No, Category=Conn, ComponentLink2Description=Datasheet, ComponentLink2URL=http://suddendocs.samtec.com/catalog_english/tsw_th.pdf, Conn Gender=Male, Conn Orientation=Vertical, Contact Material=Gold,Nickel, Device Class L1=Connectors, Device Class L2="Headers and Wire Housings", Device Class L3=unset, Digikey Description="CONN HEADER VERT 15POS 2.54MM", Footprint Url=http://suddendocs.samtec.com/prints/tsw-xxx-xx-x-x-xx-xxx-footprint.pdf, Height=8.71mm, Lead Free=Yes, Manufacturer Part Number=TSW-115-07-G-S, Number of Contacts=15, Number of Rows=1, Octopart=https://octopart.com/tsw-115-07-g-s-samtec-272210, Package=TSW-115-07-G-S, Pitch=2.54mm, RoHS=TRUE
P4: library part CMP-1024-00335-1, "0.025\" SQ Post Header, Through-hole, Vertical, -55 to 105 degC, 2.54 mm Pitch, 6-Pin, Male, RoHS", Manufacturer=Samtec, Temperature Range="-55 to 105 degC", ComponentLink1Description="Manufacturer URL", ComponentLink1URL=http://www.samtec.com, ComponentLink2Description=Datasheet, ComponentLink2URL=http://www.samtec.com/documents/webfiles/pdf/TSW_TH.PDF, ComponentLink3Description="Package Specification", ComponentLink3URL=http://www.samtec.com/documents/webfiles/cpdf/TSW-XXX-XX-XXX-X-XX-XXX-MKT.pdf, DatasheetVersion=F-214, Mounting Technology=Through-hole, Orientation=Vertical, PackageDescription=".025[0.64] SQ. Post Terminal Strip Assembly", PackageReference=TSW-103-08-X-D, PackageVersion="DM, 8/1988", PartNumber=TSW-103-08-T-D, Pitch="2.54 mm", RoHS=True
R1 R2 R3 R4 R5 R6 R7 R8: library part CMP-009-00186-3, "Res Thick Film 0805 1K Ohm 5% 0.5W(1/2W) ±200ppm/C Pad SMD Automotive T/R", Case/Package=0805, Max Operating Temperature=155°C, Min Operating Temperature=-55°C, Tolerance=5%, Voltage Rating=400V, Mounting Technology="Surface Mount"
RX TX: library part CMP-44529-000016-1, "LED YELLOW CLEAR CHIP SMD", Case Code (Imperial)=0603, Case Code (Metric)=1608, Color=Yellow, Forward Current=20mA, Forward Voltage=2V, Lens Color=Colorless, Max Operating Temperature=85°C, Min Operating Temperature=-40°C, Package Quantity=2000, Case/Package=0603, Dominant Wavelength=590nm, Height=0.95mm, Illumination Color=Yellow, Lead Free="Lead Free", Length=1.6mm, Lens Style=Clear, Lens Transparency=Clear, Luminous Intensity=900mcd, Mount="Surface Mount", Packaging="Tape and Reel", Test Current=20mA, Viewing Angle=60°, Width=0.8mm
SW1: library part CMP-10040-000001-2, "SWITCH TACTILE SPST-NO 0.05A 16V", Case/Package=SMD/SMT, Color=Black, Current Rating=50mA, Max Operating Temperature=85°C, Min Operating Temperature=-40°C, Operating Force=160gf, Package Quantity=2900, Voltage Rating (DC)=16V, Actuator Type=Standard, Contact Plating=Silver, Depth=4.6mm, Illumination Type=Non-Illuminated, Lead Free="Lead Free", Length=3.2mm, Max Current Rating=50mA, Mechanical Life=150000Cycles, Mount="Surface Mount", Orientation=Straight, Packaging="Tape and Reel", RoHS Compliant=Yes, Switch Function=Off-Mom, Switch Travel=0.15mm, Termination=J-Bend, Throw Configuration=SPST
U1: library part CMP-0095-00269-2, "8-bit AVR Microcontroller, 32KB Flash, 1KB EEPROM, 2KB SRAM, 32-pin TQFP, Industrial Grade (-40°C to 85°C)", Code_JEDEC=MS-026-ABA, ComponentLink1Description="Manufacturer URL", ComponentLink1URL=http://www.atmel.com/, ComponentLink2Description="ATmega48A/48PA/88A/88PA/168A/168PA/328/328P Datasheet", ComponentLink2URL=http://www.atmel.com/dyn/resources/prod_documents/doc8271.pdf, ComponentLink3Description="ATmega48A/48PA/88A/88PA/168A/168PA/328/328P Summary", ComponentLink3URL=http://www.atmel.com/dyn/resources/prod_documents/8271S.pdf, DatasheetVersion="revD, May-2011", PackageDescription="32-Lead, 7x7x1.0 mm Body, 0.8mm Lead Pitch, Thin Profile Plastic Quad Flat Package (TQFP)", PackageReference=32A, PackageVersion="revC, Oct-2010", RevisionNote="DatasheetVersion & PackageVersion updated. URLs added."
U2: library part CMP-0062-01628-3, "800mA Low-Dropout Linear Regulator, 4-pin SOT-223, Pb-Free", Manufacturer="National Semiconductor", PackageTopMarking=XYTT*N06B, PowerWise=N, Code_IPC=SOT223-4, Code_JEDEC=TO-261-AA, ComponentLink1Description="Manufacturer URL", ComponentLink1URL=http://www.national.com/, ComponentLink2Description="LM1117 Datasheet", ComponentLink2URL=http://www.national.com/ds/LM/LM1117.pdf, ComponentLink3Description="LM1117 Web Page", ComponentLink3URL=http://www.national.com/pf/LM/LM1117.html, ComponentLink4Description="MP04A Package Page", ComponentLink4URL=http://www.national.com/packaging/folders/mp04a.html, CompType="LDO IC", DatasheetVersion=Apr-2006, High-Reliability=Y, PackageDescription="Molded SOT-223, 6.50 x 3.56 x 1.6mm Body, 4 Lead, 2.3mm Pitch", PackageReference=MP04A, PackageVersion="revB, Apr-2003", PartNumber=LM1117IMPX-5.0/NOPB, PinCount=4, RevisionNote="SCH symbol layout adjusted", RoHS=Y
U_USB: library part CMP-2000-05029-1, "IC USB FS SERIAL UART 28-SSOP", Manufacturer=FTDI, Maximum Operating Temperature=+85degC, Minimum Operating Temperature=-40degC, Package Type=SSOP, Datasheet URL=http://datasheet.octopart.com/FT232RL-FTDI-datasheet-120501.pdf, Datasheet Version="Rev. 1.04, 02/2006", Dimensions=10.2x5.3x1.75mm, Height=1.75mm, Length=10.2mm, Manufacturer URL=http://www.ftdichip.com/, Maximum Data Rate=3MBd, Mounting Type=SurfaceMount, Number of Channels per Chip=1, Pin Count=28, Receive FIFO=256B, Transmit FIFO=128B, Width=5.3mm
X1: library part CMP-003-00017-2, "Ceramic SMD Crystal, 16 MHz, +/- 20 ppm, 18 pF, -20 to 70 degC, 4-Pin SMD, RoHS, Tape and Reel", Case/Package=CSMD, Frequency=16MHz, Frequency Tolerance=20ppm, Load Capacitance=18pF, Manufacturer=Abracon, Max Operating Temperature=70°C, Min Operating Temperature=-20°C, Package Description="4-Pin Surface Mount Device, Body 5 x 3.2 mm", Package Quantity=1000, Package Reference=ABM3B, Resistance=50Ohm, Datasheet URL=http://www.abracon.com/Resonators/abm3b.pdf, Datasheet Version=Aug-15, ESR=50, Manufacturer URL=http://www.abracon.com/, Mounting Technology=SM, Packaging=TapeandReel, Pins=4, RoHS Compliant=True, Tolerance=20ppm

## Via types
v1: diameter 0.6, hole 0.3, Top Layer to Bottom Layer, 63 vias

## Nets (pads, with @x,y where several pads share a name; then routed paths per layer and width w, separated by ;. In a path a pad name is that pad's centre, name@x,y a point inside that pad or via, vN(x,y) a via of type N, cw(c..) or ccw(c..) an arc to the next point about the centre after c; other vN are vias at no path point)
3V3: C6.1 J_NANO_2.14 U_USB.17 | length 28
  Top Layer w0.4: v1(80.01,68.453) 81.28,69.723 v1(84.798,69.723)
  Bottom Layer w0.4: C6.1 79.317,67.716 80.01,68.409 v1(80.01,68.453) ; v1(84.798,69.723) v1@84.836,69.723 ; U_USB.17 86.271,73.405 84.836,71.97 v1@84.836,69.723 ; J_NANO_2.14 91.139,61.007 91.139,64.552 89.62,66.071 89.62,68.504 89.143,68.981 85.35,68.981 84.836,69.495 v1@84.836,69.723
+5V: C3.1 C5.1 C7.1 C8.2 D1.1 J_NANO_2.4 P4.2 R5.2 R8.1 RX.2 TX.2 U1.4 U1.6 U1.18 U2.2 U2.4 U_USB.4 U_USB.20 | length 143.9
  Top Layer w0.4: R8.1@78.867,66.391 79.029,66.391 80.137,65.283 v1(80.137,62.992) 80.137,60.452 80.391,60.198 81.343,60.198 RX.2 82.486,61.341 84.611,61.341 TX.2 TX.2@85.215,60.737 ; P4.2 81.534,96.393 88.011,96.393 88.9,95.504 88.9,94.361 89.281,93.98 93.873,93.98 94.107,93.746 94.107,86.233 J_NANO_2.4 91.708,83.834 90.819,83.834 v1(89.662,82.677) ; v1(81.026,83.947) 81.08,83.947 81.461,84.328 83.355,84.328 83.751,83.932 v1(83.805,83.932) ; v1(83.312,78.613) 82.808,78.109 82.477,78.109 U1.4 79.179,81.407 78.613,81.407 77.978,80.772 77.978,80.345 U1.6 82.931,75.392 82.931,74.402 84.133,73.2 84.133,73.058 U1.18 84.649,72.496 85.598,71.547 v1(85.598,71.501) ; v1(84.582,67.945) 85.56,68.923 85.56,69.685 v1(85.598,69.723) ; v1(90.17,85.725) R5.2
  Bottom Layer w0.4: v1(81.026,83.947) 81.061,83.912 81.061,82.39 U_USB.4 81.081,82.37 81.081,81.437 82.761,79.756 83.078,79.756 83.312,79.522 v1(83.312,78.613) ; C7.1 82.386,87.707 83.225,86.868 86.868,86.868 87.63,86.106 87.63,85.291 89.101,83.82 v1(90.805,83.82) ; v1(83.805,83.932) 87.603,83.932 88.82,82.715 89.624,82.715 v1(89.662,82.677) ; U_USB.20 84.321,73.78 83.185,72.644 83.185,69.342 83.928,68.599 84.853,68.599 85.634,67.818 C8.2 C3.1 86.778,63.506 87.8,62.484 D1.1 88.25,59.802 86.741,58.293 U2.4 U2.2 77.919,58.009 77.335,58.593 76.718,58.593 76.484,58.827 76.484,59.329 76.718,59.563 79.629,59.563 80.137,60.071 v1(80.137,62.992) 80.137,64.135 81.153,65.151 83.661,65.151 83.895,65.385 83.895,65.951 C5.1 84.582,66.638 v1(84.582,67.945) ; v1(85.598,69.723) v1(85.598,71.501) ; v1(90.17,85.725) 90.208,85.687 90.208,85.306 90.678,84.836 J_NANO_2.4
D+: J2.2 J3.3 U_USB.15 | length 89.2
  Top Layer w0.3: J3.3 83.26,56.741 83.26,57.501 83.465,57.706 86.53,57.706 86.832,57.404 v1(88.773,57.404) ; v1(89.535,52.578) 91.059,54.102 91.059,57.45 90.424,58.085 v1(90.424,58.166)
  Bottom Layer w0.3: U_USB.15 87.571,77.129 87.395,77.305 82.588,77.305 77.343,82.55 J2.2 78.343,86.487 78.343,88.282 77.852,88.773 76.327,88.773 74.422,86.868 74.422,54.229 76.073,52.578 v1(89.535,52.578) ; v1(88.773,57.404) 89.535,58.166 v1(90.424,58.166)
D-: J2.1 J3.2 U_USB.16 | length 42.4
  Top Layer w0.3: J3.2 82.46,56.741 82.46,59.727 v1(83.312,60.579) ; v1(83.312,62.103) 83.312,64.975 83.869,65.532 86.184,65.532 86.741,66.089 86.741,68.823 86.455,69.109 86.455,69.666 v1(86.398,69.723)
  Bottom Layer w0.3: J2.1 76.843,86.987 76.573,86.987 76.311,86.725 76.311,81.728 81.234,76.805 86.57,76.805 86.745,76.629 86.745,76.577 86.921,76.401 U_USB.16 86.921,72.856 86.398,72.333 v1(86.398,69.723) ; v1(83.312,60.579) v1(83.312,62.103)
GND: C1.1 C2.2 C3.2 C5.2 C6.2 C7.2 C8.1 C9.2 CLK.1 J3.5 J3.6 J3.7 J3.8 J3.9 J3.10 J3.11 J_NANO_1.4 J_NANO_2.2 P4.6 PWR.1 R4.1 SW1.3 U1.3 U1.5 U1.21 U2.1 U_USB.7 U_USB.18 U_USB.21 U_USB.25 U_USB.26 X1.2 X1.4 | length 102.6
  Top Layer w0.4: v1(73.406,52.959) 75.438,52.959 76.485,54.006 J3.8 J3.9 J3.10 J3.11 86.656,54.102 88.947,54.102 89.181,54.336 89.181,56.419 88.947,56.653 85.745,56.653 J3.7 85.587,56.666 J3.5 ; v1(73.406,54.229) 75.647,54.229 77.999,56.581 J3.6 ; v1(76.708,57.15) 76.708,58.166 78.766,60.224 78.766,60.871 PWR.1 ; v1(79.629,86.868) 79.624,86.863 79.624,86.281 79.858,86.047 SW1.3 ; U1.5 82.238,77.216 83.652,77.216 84.328,77.892 v1(84.328,78.501) 84.328,79.11 83.825,79.613 82.104,79.613 U1.3 ; v1(85.339,78.607) 85.339,75.247 U1.21 ; C1.1 87.583,71.292 87.583,70.532 87.757,70.358 v1(87.757,70.231) ; CLK.1 88.989,60.221 88.989,60.109 v1(89.027,60.071)
  Bottom Layer w0.4: v1(75.931,61.468) 75.931,61.58 78.184,63.833 R4.1 78.367,66.096 78.367,67.641 C6.2 78.367,67.741 78.367,68.166 77.567,68.966 77.567,69.266 77.167,69.666 X1.4 ; v1(76.708,57.15) 76.708,56.638 77.353,55.993 U2.1 ; v1(77.089,76.708) 77.089,74.295 79.318,72.066 X1.2 81.071,72.27 U_USB.25 ; v1(79.629,86.868) 79.667,86.906 79.667,87.541 79.883,87.757 C7.2 ; U_USB.26 80.431,74.94 80.431,75.859 v1(80.827,76.255) 83.28,76.255 83.661,75.873 83.661,74.94 U_USB.21 ; v1(80.772,67.564) 81.421,67.564 82.513,66.472 C5.2 ; v1(81.026,63.627) C2.2 ; U_USB.7 U_USB.7@83.031,82.39 ; v1(83.947,70.612) 83.947,71.93 85.621,73.604 U_USB.18 ; P4.6 v1(87.757,95.123) ; C3.2@88.228,65.736 89.046,64.918 89.046,64.566 C9.2 89.096,64.491 89.146,64.441 89.171,64.441 89.35,64.262 v1(90.439,64.262) ; C3.2 C8.1
MISO: J_NANO_1.15 P4.1 U1.16 | length 62.5
  Top Layer w0.254: P4.1 76.708,92.583 75.438,91.313 72.898,91.313 72.136,90.551 72.136,58.039 J_NANO_1.15 74.422,56.896 77.216,59.69 77.216,67.16 U1.16
MOSI: J_NANO_1.14 P4.4 U1.15 | length 62.6
  Top Layer w0.3: J_NANO_1.14 75.692,59.436 76.581,60.325 76.581,67.657 U1.15
  Bottom Layer w0.3: J_NANO_1.14 72.009,60.706 72.009,90.424 72.898,91.313 75.311,91.313 77.851,93.853 82.296,93.853 82.565,94.122 82.565,94.884 P4.4
NetC1_2: C1.2 J_NANO_2.13 U1.20 | length 15.8
  Top Layer w0.3: U1.20 86.788,72.666 87.595,72.666 88.185,72.077 C1.2@88.185,71.964 ; C1.2 88.646,71.502 88.646,68.199 91.089,65.756 91.089,62.327 91.44,61.976 J_NANO_2.13
NetC4_1: C4.1 U_USB.2 | length 16.7
  Top Layer w0.3: v1(89.535,75.438) 89.535,75.357 90.043,74.849 90.043,73.787 C4.1
  Bottom Layer w0.3: U_USB.2 79.771,80.884 82.804,77.851 85.06,77.851 85.075,77.836 85.613,77.836 85.628,77.851 87.962,77.851 88.138,77.675 88.138,76.588 88.684,76.042 88.901,76.042 89.505,75.438 v1(89.535,75.438)
NetC4_2: C4.2 J_NANO_2.6 U1.22 | length 19.5
  Top Layer w0.3: U1.22 88.963,72.754 88.963,72.565 88.98,72.548 88.98,71.875 89.148,71.708 89.148,70.745 89.859,70.034 90.494,70.034 v1(90.551,69.977) ; v1(90.917,79.756) J_NANO_2.6
  Bottom Layer w0.3: v1(90.551,69.977) 90.608,70.034 91.146,70.034 91.575,70.463 91.575,72.58 91.652,72.657 91.652,72.683 91.848,72.879 91.848,73.933 90.924,74.857 90.924,79.749 v1(90.917,79.756)
NetCLK_2: CLK.2 R1.2 | length 2.1
  Top Layer w0.3: CLK.2 R1.2
NetF1_1: F1.1 J3.1 | length 7.8
  Top Layer w0.3: J3.1 81.96,56.591 81.96,55.708 82.296,55.372 88.055,55.372 88.086,55.403 88.231,55.403 88.431,55.603 F1.1
NetJ_NANO_1_5: J_NANO_1.5 U1.32 | length 15.4
  Top Layer w0.3: J_NANO_1.5 75.47,84.487 77.757,84.487 78.233,84.963 83.693,84.963 84.963,83.693 84.963,82.877 84.083,81.997 U1.32
NetJ_NANO_1_6: J_NANO_1.6 U1.1 | length 11.6
  Top Layer w0.3: J_NANO_1.6 73.522,79.999 73.522,80.634 76.708,83.82 80.16,83.82 U1.1
NetJ_NANO_1_7: J_NANO_1.7 U1.2 | length 11.6
  Top Layer w0.3: J_NANO_1.7 73.471,77.408 73.471,78.17 78.232,82.931 79.902,82.931 81.452,81.381 U1.2
NetJ_NANO_1_8: J_NANO_1.8 U1.9 | length 5.3
  Top Layer w0.3: J_NANO_1.8 76.812,74.676 U1.9
NetJ_NANO_1_9: J_NANO_1.9 U1.10 | length 6.7
  Top Layer w0.3: J_NANO_1.9 75.404,72.136 U1.10
NetJ_NANO_1_10: J_NANO_1.10 U1.11 | length 8.1
  Top Layer w0.3: J_NANO_1.10 73.522,69.839 74.238,69.839 U1.11
NetJ_NANO_1_11: J_NANO_1.11 U1.12 | length 10.6
  Top Layer w0.3: J_NANO_1.11 74.422,67.056 74.803,67.437 74.803,69.293 74.979,69.469 74.999,69.469 U1.12
NetJ_NANO_1_12: J_NANO_1.12 U1.13 | length 12.1
  Top Layer w0.3: J_NANO_1.12 73.522,64.759 73.522,65.267 75.438,67.183 75.438,68.776 U1.13
NetJ_NANO_1_13: J_NANO_1.13 U1.14 | length 15.3
  Top Layer w0.3: J_NANO_1.13 75.057,61.976 76.073,62.992 76.073,68.28 U1.14
NetJ_NANO_2_5: J_NANO_2.5 U1.19 | length 19.2
  Top Layer w0.3: U1.19 86.378,71.945 86.991,71.945 v1(87.048,71.888) ; v1(90.043,81.153) 90.043,81.915 90.424,82.296 J_NANO_2.5
  Bottom Layer w0.3: v1(87.048,71.888) 90.176,71.888 91.152,72.864 91.152,73.567 90.424,74.295 90.424,76.454 90.043,76.835 v1(90.043,81.153)
NetJ_NANO_2_7: J_NANO_2.7 U1.28 | length 11
  Top Layer w0.3: U1.28 88.404,81.742 89.108,81.742 v1(89.154,81.788)
  Bottom Layer w0.3: v1(89.154,81.788) 89.211,81.845 89.902,81.845 90.084,82.027 90.693,82.027 91.567,81.153 91.567,78.359 J_NANO_2.7
NetJ_NANO_2_8: J_NANO_2.8 U1.27 | length 14.2
  Top Layer w0.3: U1.27 88.311,80.518 89.759,80.518 89.774,80.503 91.306,80.503 91.694,80.891 93.226,80.891 94.107,80.01 94.107,76.073 J_NANO_2.8
NetJ_NANO_2_9: J_NANO_2.9 U1.26 | length 11.3
  Top Layer w0.3: U1.26 87.477,78.57 88.646,79.739 v1(88.646,79.756) ; v1(89.408,76.454) 89.489,76.454 89.909,76.034 ; 89.91,76.034 90.543,75.401 90.543,74.456 92.71,72.289 J_NANO_2.9
  Bottom Layer w0.3: v1(88.646,79.756) 88.703,79.699 89.232,79.699 89.408,79.523 v1(89.408,76.454)
NetJ_NANO_2_10: J_NANO_2.10 U1.25 | length 12.6
  Top Layer w0.3: U1.25 88.369,78.313 88.565,78.313 89.154,77.724 91.043,75.835 91.043,74.692 92.464,73.271 93.431,73.271 93.853,72.849 93.853,70.739 J_NANO_2.10
NetJ_NANO_2_11: J_NANO_2.11 U1.24 | length 12.4
  Top Layer w0.3: U1.24 89.224,74.756 89.224,74.606 v1(89.281,74.549) ; v1(90.502,73.216) 90.502,73.135 90.723,72.914 v1(90.723,71.247) ; v1(90.932,67.31) 91.013,67.31 91.267,67.056 J_NANO_2.11
  Bottom Layer w0.3: v1(89.281,74.549) 89.281,74.493 90.502,73.272 v1(90.502,73.216) ; v1(90.723,71.247) 90.723,71.166 90.573,71.016 90.573,70.918 89.901,70.246 89.901,69.708 90.932,68.677 v1(90.932,67.31)
NetJ_NANO_2_12: J_NANO_2.12 U1.23 | length 13.5
  Top Layer w0.3: U1.23 88.843,74.006 88.843,73.844 v1(88.9,73.787) ; v1(89.798,71.105) 89.798,71.186 89.97,71.358 v1(89.97,72.618)
  Bottom Layer w0.3: v1(88.9,73.787) 88.9,73.738 89.97,72.668 v1(89.97,72.618) ; v1(89.798,71.105) 89.798,71.024 89.401,70.627 89.401,69.501 90.17,68.732 90.17,67.056 J_NANO_2.12
NetPWR_2: PWR.2 R8.2 | length 2.2
  Top Layer w0.3: PWR.2 R8.2
NetR2_2: R2.2 U_USB.1 | length 7.7
  Bottom Layer w0.3: U_USB.1 79.121,84.074 80.977,85.93 R2.2
NetR3_2: R3.2 U_USB.5 | length 7.7
  Bottom Layer w0.3: U_USB.5 81.75,82.409 81.75,84.036 82.296,84.582 86.057,84.582 86.233,84.758 86.233,85.803 R3.2
NetR6_1: R6.1 RX.1 | length 2.1
  Top Layer w0.3: RX.1 82.042,64.467 R6.1
NetR6_2: R6.2 U_USB.23 | length 8.7
  Top Layer w0.3: R6.2 82.169,68.118 82.296,68.245 v1(82.296,68.326)
  Bottom Layer w0.3: v1(82.296,68.326) 82.296,68.407 82.135,68.568 82.135,73.079 82.371,73.315 U_USB.23
NetR7_1: R7.1 TX.1 | length 2.2
  Top Layer w0.3: TX.1 85.182,64.56 R7.1
NetR7_2: R7.2 U_USB.22 | length 10.3
  Top Layer w0.3: v1(83.439,68.072) 83.45,68.061 83.45,67.172 84.153,66.47 R7.2
  Bottom Layer w0.3: U_USB.22 83.021,73.258 82.635,72.872 82.635,68.957 83.439,68.153 v1(83.439,68.072)
PB5_SCK: J_NANO_2.15 P4.3 R1.1 U1.17 | length 85.5
  Top Layer w0.3: v1(75.423,85.359) 75.423,90.028 76.073,90.678 80.899,90.678 P4.3 ; U1.17 85.575,70.485 86.555,70.485 88.146,68.894 88.146,67.992 88.265,67.873 R1.1 88.265,65.659 88.467,65.457 89.229,65.457 89.789,64.897 89.789,60.579 92.518,57.85 92.518,57.088 93.472,56.134 93.472,54.991 v1(92.075,53.594)
  Bottom Layer w0.3: v1(75.423,85.359) 75.423,84.601 75.565,84.459 75.565,80.161 75.117,79.713 75.117,54.423 75.946,53.594 v1(92.075,53.594)
PB6: U1.7 X1.3 | length 18.1
  Top Layer w0.3: v1(76.835,79.883) 76.892,79.826 77.366,79.826 U1.7
  Bottom Layer w0.3: v1(76.835,79.883) 76.778,79.826 76.397,79.826 75.617,79.046 75.617,71.259 75.883,70.993 80.391,70.993 80.772,70.612 80.772,69.761 X1.3
PB7: U1.8 X1.1 | length 9.4
  Top Layer w0.3: v1(76.581,78.994) 77.066,78.994 U1.8
  Bottom Layer w0.3: v1(76.581,78.994) 76.2,78.613 76.2,72.516 76.65,72.066 X1.1
PD0_RXD: J_NANO_1.1 R2.1 U1.30 | length 39
  Top Layer w0.3: J_NANO_1.1 74.676,93.853 87.884,93.853 88.519,93.218 v1(88.519,85.852) 88.519,84.12 U1.30
  Bottom Layer w0.3: R2.1 84.328,89.281 84.582,89.535 88.011,89.535 88.519,89.027 v1(88.519,85.852)
PD1_TXD: J_NANO_1.2 R3.1 U1.31 | length 28.9
  Top Layer w0.3: J_NANO_1.2 J_NANO_1.2@73.582,89.916 ; v1(82.042,90.678) 82.114,90.678 82.368,90.932 85.852,90.932 87.757,89.027 87.757,84.489 U1.31
  Bottom Layer w0.3: J_NANO_1.2 73.616,89.916 74.378,90.678 v1(82.042,90.678) ; R3.1 86.233,87.932 86.233,88.773 86.487,89.027 87.503,89.027 87.757,88.773 v1(87.757,87.503)
RESET: J_NANO_1.3 J_NANO_2.3 P4.5 R5.1 SW1.2 U1.29 | length 39.6
  Top Layer w0.3: v1(83.82,90.043) 83.82,88.392 84.074,88.138 85.074,88.138 SW1.2 ; U1.29 85.78,80.331 92.71,87.261 J_NANO_2.3 92.71,88.265 92.408,88.567 R5.1 90.008,88.567 89.169,89.406 v1(89.169,91.948)
  Bottom Layer w0.3: J_NANO_1.3 75.383,89.48 83.57,89.48 83.763,89.673 83.763,89.986 v1(83.82,90.043) 83.82,91.059 P4.5 88.392,92.583 88.462,92.513 88.604,92.513 v1(89.169,91.948)
VIN: J_NANO_2.1 U2.3 | length 63.6
  Bottom Layer w0.5: U2.3 78.052,60.442 76.444,60.442 75.819,59.817 75.819,55.372 76.581,54.61 93.091,54.61 94.107,55.626 94.107,91.059 J_NANO_2.1
VUSB: C2.1 C9.1 D1.2 F1.2 | length 29.1
  Top Layer w0.4: v1(86.106,62.992) 86.868,62.23 86.868,60.766 88.541,59.093 88.735,59.093 v1(88.773,59.055) ; v1(86.36,59.182) 87.503,59.182 88.392,58.293 89.027,58.293 89.981,57.339 89.981,55.903 F1.2@90.076,55.808
  Top Layer w0.5: F1.2@90.076,55.808 F1.2
  Bottom Layer w0.4: C2.1@84.201,63.664 84.201,64.477 84.494,64.77 85.813,64.77 86.106,64.477 v1(86.106,62.992) ; C2.1@84.238,63.576 86.379,61.435 86.379,59.201 v1(86.36,59.182) ; C9.1 88.196,63.92 88.489,63.627 89.769,63.627 90.101,63.295 D1.2@90.101,62.533 ; v1(88.773,59.055) 88.784,59.066 89.673,59.066 90.15,59.543 D1.2
  Bottom Layer w0.5: C2.1@84.201,63.664 C2.1 ; D1.2@90.101,62.533 D1.2
pads on no net: J3.4 R4.2 SW1.1 SW1.4 U_USB.3 U_USB.6 U_USB.8 U_USB.9 U_USB.10 U_USB.11 U_USB.12 U_USB.13 U_USB.14 U_USB.19 U_USB.24 U_USB.27 U_USB.28

## Polygon pours and split planes (outlines as drawn)
GND on Bottom Layer "GND_L04_P002" (solid, pour order 2): 71.374,97.155 94.615,97.155 94.615,51.435 71.374,51.435
GND on Top Layer "GND_L01_P000" (solid, pour order 0): 71.374,97.155 94.615,97.155 94.615,51.435 71.374,51.435
GND on Layer 2 (split plane): 94.105,51.945 71.884,51.945 71.884,96.645 94.105,96.645
GND on GND (split plane): 94.105,51.945 71.884,51.945 71.884,96.645 94.105,96.645

## Silkscreen, mask and mechanical layers (free items; w line width, h text height)
Mechanical 1:
  the board outline again, w0.254